# EAGLE board 12VAttinyDischargeChecker-A3 (EAGLE 8.5.2)
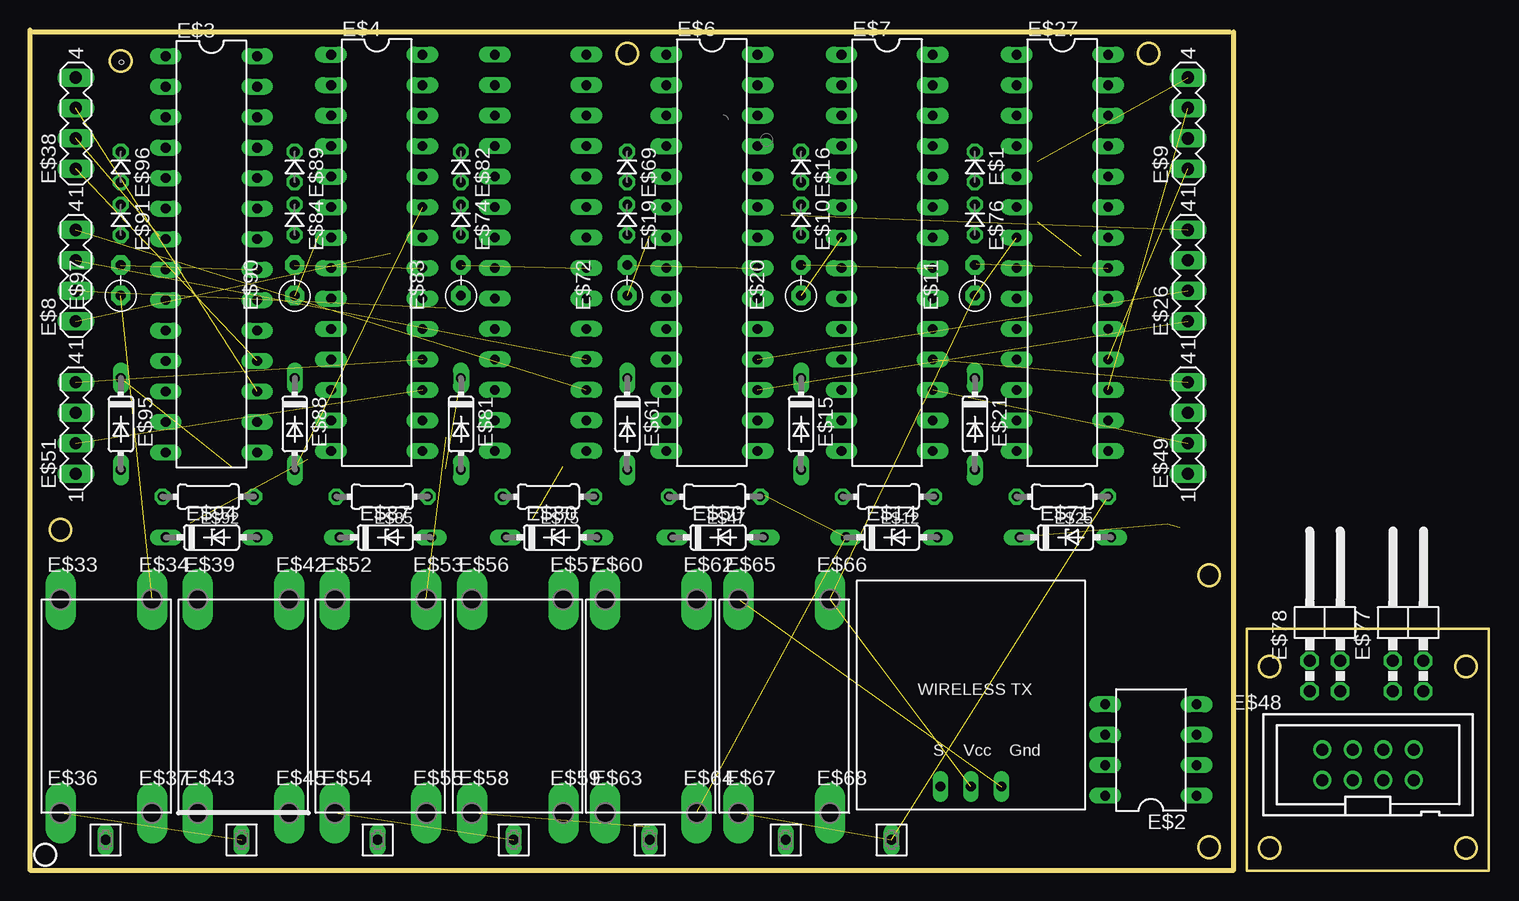
[diagram p0: board, top side]
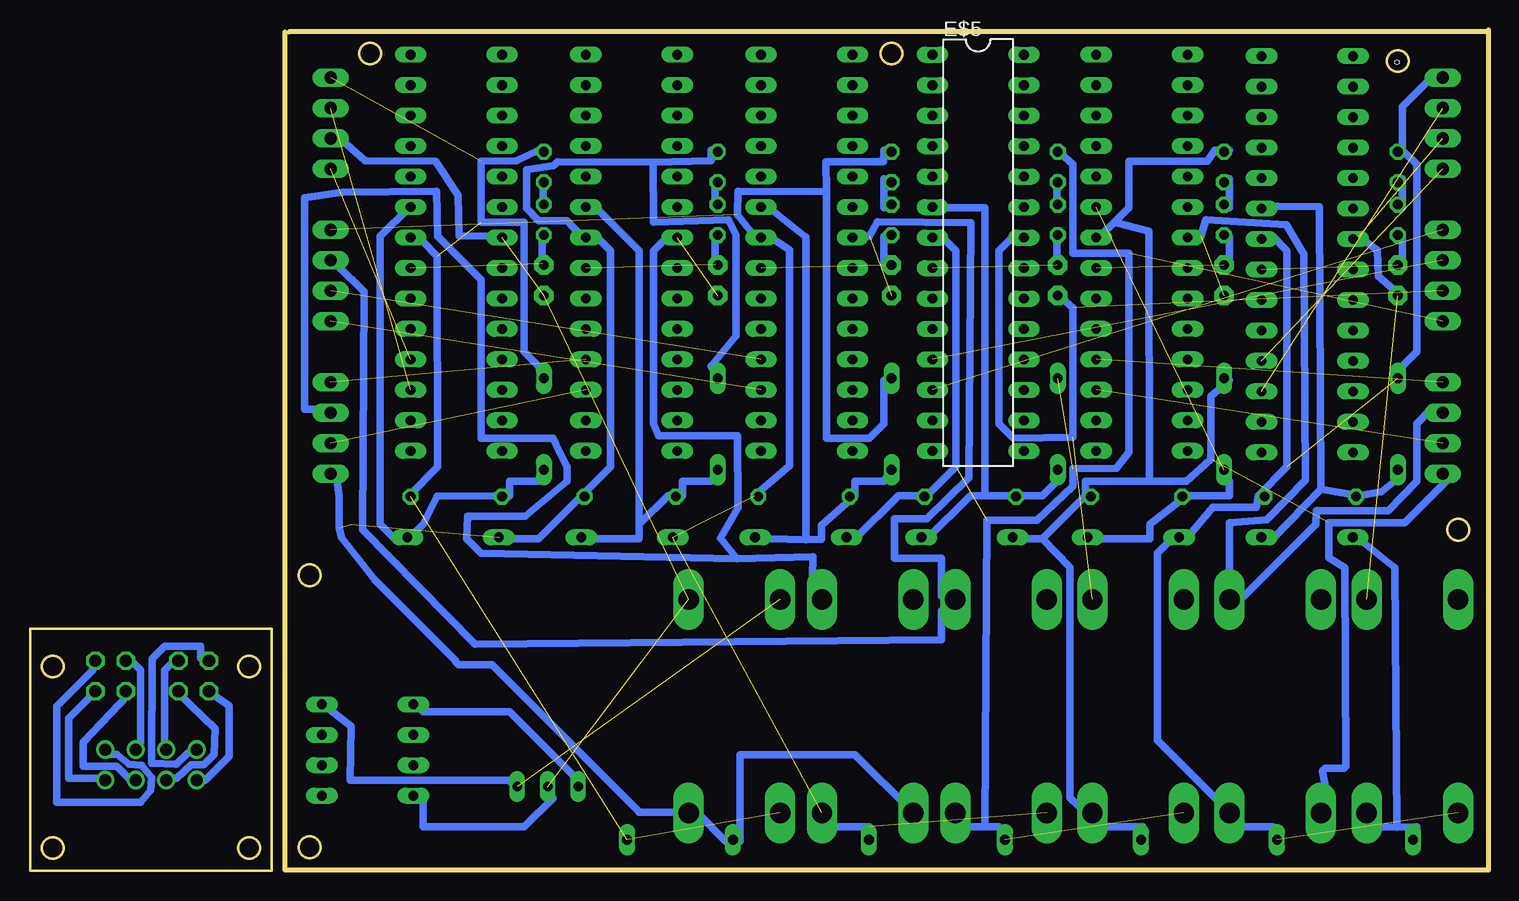
[diagram p1: board, bottom side, seen from below]

Size 121.58 x 70.05 mm. Coordinates in mm from the lower left corner, seen from the top.
Outline: 0,69.9 0,0.05 100.33,0.05 100.33,69.9
Outline: 0,69.9 0,70.05
Outline: 0,69.9 100,69.9
Outline: 101.42,0 101.42,20.17 121.58,20.17 121.58,0 101.42,0
Outline: circle at 119.69,17.01 radius 0.89
Outline: circle at 103.31,17.01 radius 0.89
Outline: circle at 103.31,1.89 radius 0.89
Outline: circle at 119.69,1.89 radius 0.89
Outline: circle at 98.28,1.94 radius 0.89
Outline: circle at 98.28,24.62 radius 0.89
Outline: circle at 7.56,67.46 radius 0.89
Outline: circle at 2.52,28.4 radius 0.89
Outline: circle at 49.77,68.09 radius 0.89
Outline: circle at 93.23,68.09 radius 0.89
Copper layers (1*16): Top 0.035mm / dielectric 1.5mm / Bottom 0.035mm
Design rules "default": minimum track width 10mil, minimum drill 24mil, track to track 8mil, track to pad 8mil, pad to pad 8mil, via to via 8mil, smd to smd 8mil, copper to edge 40mil, drill to drill 8mil, minimum pad ring 10mil, minimum via ring 8mil, stop-mask expansion 4mil, vias tented up to drill 0mil, thermal gap 10mil
Holes 0.35 mm at 7.62,67.36

## Footprints (pad centres in the part's own frame; a part is rotated, then mirrored left to right if it is on the bottom)
D-2.5 = drill 0.813 octagon: A 1.27,0; C -1.27,0
DIL08 = drill 0.813 long: 1 -3.81,-3.81; 2 -1.27,-3.81; 3 1.27,-3.81; 4 3.81,-3.81; 5 3.81,3.81; 6 1.27,3.81; 7 -1.27,3.81; 8 -3.81,3.81
DIL28-3 = drill 0.813 long: 1 -16.51,-3.81; 2 -13.97,-3.81; 3 -11.43,-3.81; 4 -8.89,-3.81; 5 -6.35,-3.81; 6 -3.81,-3.81; 7 -1.27,-3.81; 8 1.27,-3.81; 9 3.81,-3.81; 10 6.35,-3.81; 11 8.89,-3.81; 12 11.43,-3.81; 13 13.97,-3.81; 14 16.51,-3.81; 15 16.51,3.81; 16 13.97,3.81; 17 11.43,3.81; 18 8.89,3.81; 19 6.35,3.81; 20 3.81,3.81; 21 1.27,3.81; 22 -1.27,3.81; 23 -3.81,3.81; 24 -6.35,3.81; 25 -8.89,3.81; 26 -11.43,3.81; 27 -13.97,3.81; 28 -16.51,3.81
MA04-1 = drill 1.016 long: 1 -3.81,0; 2 -1.27,0; 3 1.27,0; 4 3.81,0
RS-2,5 = drill 0.813 pad 1.6 octagon: 1 -1.27,0; 2 1.27,0
0204/7 = drill 0.813 octagon: 1 -3.81,0; 2 3.81,0
DO35Z7 = drill 0.813 long: A 3.81,0; C -3.81,0
DO35-7A = drill 0.813 long: A 3.81,0; C -3.81,0
FE01-1 = drill 0.813 long: 1 -1.27,0
WIRELESS-TX-FLAT = drill 0.8 long: P$1 0.635,-6.35; P$2 -1.905,-6.35; P$3 3.175,-6.35
P1-17Y = drill 1.702 pad 2.121 long: TP 0,0
PAK100/2500-8 = drill 1 pad 1.422: 3 -2.54,-1.27; 4 -2.54,1.27; 5 0,-1.27; 6 0,1.27; 7 2.54,-1.27; 8 2.54,1.27; 9 5.08,-1.27; 10 5.08,1.27
2X02/90 = drill 1.016 octagon: 1 -1.27,-6.35; 2 -1.27,-3.81; 3 1.27,-6.35; 4 1.27,-3.81

## Placement (x,y rotation side)
E$1  [D-2.5]  78.75,58.64 270 top
E$2  [DIL08]  93.43,10.05 90 top
E$3  [DIL28-3]  15.11,51.36 270 top
E$4  [DIL28-3]  28.89,51.48 270 top
E$5  [DIL28-3]  42.55,51.48 270 bottom
E$6  [DIL28-3]  56.83,51.48 270 top
E$7  [DIL28-3]  71.44,51.48 270 top
E$8  [MA04-1]  3.81,49.58 90 top
E$9  [MA04-1]  96.52,62.28 90 top
E$10  [D-2.5]  64.26,54.23 270 top
E$11  [RS-2,5]  78.75,49.19 90 top
E$12  220  [0204/7]  71.55,31.16 180 top
E$14  Zener 12v  [DO35Z7]  71.82,27.77 0 top
E$15  [DO35-7A]  64.26,37.22 270 top
E$16  [D-2.5]  64.26,58.64 270 top
E$17  [FE01-1]  7.56,2.57 0 top
E$19  [D-2.5]  49.77,54.23 270 top
E$20  [RS-2,5]  64.26,49.19 90 top
E$21  Zener 5V  [DO35-7A]  78.75,37.22 270 top
E$24  [FE01-1]  18.9,2.57 0 top
E$25  220  [0204/7]  86.04,31.16 180 top
E$26  [MA04-1]  96.52,49.58 90 top
E$27  [DIL28-3]  86.04,51.48 270 top
E$28  [FE01-1]  30.24,2.57 0 top
E$32  [WIRELESS-TX-FLAT]  77.79,13.36 0 top
E$33  [P1-17Y]  2.54,22.59 0 top
E$34  [P1-17Y]  10.16,22.59 0 top
E$35  [FE01-1]  41.58,2.57 0 top
E$36  [P1-17Y]  2.54,4.81 0 top
E$37  [P1-17Y]  10.16,4.81 0 top
E$38  [MA04-1]  3.81,62.28 90 top
E$39  [P1-17Y]  13.97,22.59 0 top
E$41  [FE01-1]  52.92,2.57 0 top
E$42  [P1-17Y]  21.59,22.59 0 top
E$43  [P1-17Y]  13.97,4.81 0 top
E$44  [FE01-1]  64.26,2.57 0 top
E$45  [P1-17Y]  21.59,4.81 0 top
E$46  [FE01-1]  73.08,2.57 0 top
E$47  220  [0204/7]  57.06,31.16 180 top
E$48  [PAK100/2500-8]  110.25,8.82 0 top
E$49  [MA04-1]  96.52,36.88 90 top
E$50  Zener 12v  [DO35Z7]  57.33,27.77 0 top
E$51  [MA04-1]  3.81,36.88 90 top
E$52  [P1-17Y]  25.4,22.59 0 top
E$53  [P1-17Y]  33.02,22.59 0 top
E$54  [P1-17Y]  25.4,4.81 0 top
E$55  [P1-17Y]  33.02,4.81 0 top
E$56  [P1-17Y]  36.83,22.59 0 top
E$57  [P1-17Y]  44.45,22.59 0 top
E$58  [P1-17Y]  36.83,4.81 0 top
E$59  [P1-17Y]  44.45,4.81 0 top
E$60  [P1-17Y]  47.94,22.59 0 top
E$61  [DO35-7A]  49.77,37.22 270 top
E$62  [P1-17Y]  55.56,22.59 0 top
E$63  [P1-17Y]  47.94,4.81 0 top
E$64  [P1-17Y]  55.56,4.81 0 top
E$65  [P1-17Y]  59.05,22.59 0 top
E$66  [P1-17Y]  66.67,22.59 0 top
E$67  [P1-17Y]  59.05,4.81 0 top
E$68  [P1-17Y]  66.67,4.81 0 top
E$69  [D-2.5]  49.77,58.64 270 top
E$70  [LOGO]  -39.37,56.56 0 top  (outside the outline)
E$71  Zener 12v  [DO35Z7]  86.31,27.77 0 top
E$72  [RS-2,5]  49.77,49.19 90 top
E$73  [LOGO]  53.98,60.38 0 top
E$74  [D-2.5]  35.91,54.23 270 top
E$75  220  [0204/7]  43.2,31.16 180 top
E$76  [D-2.5]  78.75,54.23 270 top
E$77  [2X02/90]  114.86,21.3 0 top
E$78  [2X02/90]  107.94,21.3 0 top
E$80  Zener 12v  [DO35Z7]  43.47,27.77 0 top
E$81  [DO35-7A]  35.91,37.22 270 top
E$82  [D-2.5]  35.91,58.64 270 top
E$83  [RS-2,5]  35.91,49.19 90 top
E$84  [D-2.5]  22.05,54.23 270 top
E$85  220  [0204/7]  29.34,31.16 180 top
E$87  Zener 12v  [DO35Z7]  29.61,27.77 0 top
E$88  [DO35-7A]  22.05,37.22 270 top
E$89  [D-2.5]  22.05,58.64 270 top
E$90  [RS-2,5]  22.05,49.19 90 top
E$91  [D-2.5]  7.56,54.23 270 top
E$92  220  [0204/7]  14.85,31.16 180 top
E$94  Zener 12v  [DO35Z7]  15.12,27.77 0 top
E$95  [DO35-7A]  7.56,37.22 270 top
E$96  [D-2.5]  7.56,58.64 270 top
E$97  [RS-2,5]  7.56,49.19 90 top

## Library data of the parts
E$1 E$10 E$14 E$16 E$19 E$50 E$69 E$71 E$74 E$76 E$80 E$82 E$84 E$87 E$89 E$91 E$94 E$96 = ref-packages
E$2-E$7 E$27 = 74xx-us
E$8 E$9 E$26 E$38 E$49 E$51 = con-lstb
E$11 E$20 E$72 E$83 E$90 E$97 = discrete
E$12 E$25 E$47 E$75 E$85 E$92 = eagle-ltspice
E$15 E$21 E$61 E$81 E$88 E$95 = diode
E$17 E$24 E$28 E$35 E$41 E$44 E$46 = con-lsta2
E$32 = LSGPackages
E$33 E$34 E$36 E$37 E$39 E$42 E$43 E$45 E$52-E$60 E$62-E$68 = testpad
E$48 = con-3m
E$70 E$73 = atmel
E$77 E$78 = pinhead

## Nets
S$2: E$3.22 E$24.1 E$36.TP E$38.4 E$45.TP E$87.C E$92.1 E$95.C E$96.C
S$3: E$2.4 E$32.P$3 E$65.TP
S$4: E$11.2 E$27.21 E$76.A
S$5: E$1.A E$76.C
S$8: E$3.7 E$34.TP E$38.2 E$97.1
S$9: E$9.3 E$27.17
S$10: E$17.1 E$37.TP E$94.C
S$11: E$5.22 E$8.2 E$53.TP E$83.1
S$12: E$4.7 E$42.TP E$51.3 E$90.1
S$13: E$9.1 E$27.18
S$14: E$6.18 E$26.2
S$15: E$2.8 E$9.2 E$11.1 E$27.7 E$32.P$1 E$66.TP
S$16: E$2.5 E$32.P$2
S$18: E$6.23 E$47.2 E$50.A E$61.A
S$19: E$5.13
S$21: E$7.23 E$12.2 E$14.A E$15.A
S$22: E$21.A E$25.2 E$27.23 E$71.A
S$23: E$4.22 E$28.1 E$43.TP E$51.1 E$55.TP E$80.C E$85.1 E$88.C E$89.C
S$24: E$5.7 E$8.1 E$35.1 E$50.C E$54.TP E$59.TP E$75.1 E$81.C E$82.C
S$25: E$6.22 E$14.C E$26.4 E$41.1 E$47.1 E$58.TP E$61.C E$64.TP E$69.C
S$26: E$7.22 E$12.1 E$15.C E$16.C E$44.1 E$49.1 E$63.TP E$68.TP E$71.C
S$27: E$6.17 E$26.1
S$28: E$6.7 E$26.3 E$57.TP E$72.1
S$29: E$5.6 E$75.2 E$80.A E$81.A
S$30: E$7.18 E$49.4
S$31: E$7.17 E$49.2
S$32: E$7.7 E$20.1 E$49.3 E$62.TP
S$33: E$4.23 E$85.2 E$87.A E$88.A
S$35: E$3.17 E$38.3
S$36: E$7.21 E$10.A E$20.2
S$37: E$1.C E$9.4 E$21.C E$25.1 E$27.22 E$46.1 E$67.TP
S$38: E$3.18 E$38.1
S$39: E$5.12 E$8.4
S$40: E$3.23 E$92.2 E$94.A E$95.A
S$41: E$10.C E$16.A
S$42: E$6.21 E$19.A E$72.2
S$43: E$48.10 E$77.4
S$44: E$48.9 E$77.3
S$45: E$19.C E$69.A
S$46: E$5.8 E$74.A E$83.2
S$47: E$74.C E$82.A
S$48: E$4.21 E$84.A E$90.2
S$49: E$84.C E$89.A
S$50: E$3.21 E$91.A E$97.2
S$51: E$48.8 E$77.2
S$52: E$48.7 E$77.1
S$53: E$48.6 E$78.4
S$54: E$48.5 E$78.3
S$55: E$48.4 E$78.2
S$56: E$48.3 E$78.1
S$57: E$91.C E$96.A
S$59: E$5.11 E$8.3
S$60: E$4.18 E$51.4
S$61: E$4.17 E$51.2

## Tracks (layer width: path | path; a pad name or v marks a point on that pad's centre or on a via)
S$2  (2 unrouted)
  Bottom 0.61: E$24.1 18,3.65 20.4,3.65 E$45.TP 21.6,4.85 27.6,10.85 27.6,26.45 26.4,27.65 E$87.C 25.2,27.65 22.96,30.27 19.36,30.27 19.2,31.25 | 19.2,31.25 16.8,33.65 16.8,51.65 18,52.85 E$3.22 | 19.2,31.25 E$92.1 | 7.2,60.05 6,58.85 6,43.25 7.2,42.05 E$95.C | 7.2,60.05 7.2,63.65 4.8,66.05 E$38.4 | 7.2,60.05 E$96.C
S$3  (1 unrouted)
  Bottom 0.61: E$32.P$3 81.7,7.51 94.9,7.51 94.8,12.05 97.43,14.08 E$2.4
S$4  (1 unrouted)
  Bottom 0.61: E$76.A 78.89,52.97 78.89,50.57 E$11.2
S$5
  Bottom 0.61: E$76.C 78.81,55.35 78.81,57.47 E$1.A
S$8  (2 unrouted)
  Bottom 0.61: E$3.7 10.8,52.85 9.26,51.71 9.2,49.54 7.37,47.94 E$97.1
S$9  (1 unrouted)
S$10
  Bottom 0.61: 7.64,3.62 9.6,3.65 E$37.TP | 7.64,3.62 6,3.65 E$17.1 | 7.64,3.62 7.81,25.22 10.8,27.65 E$94.C
S$11  (2 unrouted)
  Bottom 0.61: E$5.22 39.6,52.85 40.8,51.65 40.8,37.25 39.6,36.05 34.66,36.1 34.66,46.9 36,48.05 E$83.1
S$12  (1 unrouted)
  Bottom 0.61: E$4.7 24,52.85 23.54,54.23 16.87,53.83 15.39,51.38 15.26,32.52 18.49,29.23 21.6,28.99 21.6,22.85 E$42.TP 20.4,22.85 14.4,28.85 14.35,30 8.35,30 6,32.45 6,37.25 4.8,38.45 E$51.3
S$13  (1 unrouted)
S$14  (1 unrouted)
S$15  (3 unrouted)
  Bottom 0.61: E$32.P$1 78,6.05 80.4,3.65 88.8,3.65 88.8,6.05 E$2.8 | E$27.7 82.8,52.85 85.83,52.91 85.89,56.28 87.77,59.13 93.64,59.17 96,61.25 E$9.2
S$16
  Bottom 0.61: E$32.P$2 75.6,7.25 81.6,13.25 88.8,13.25 E$2.5
S$18
  Bottom 0.61: 56.92,27.58 55.62,27.59 55.62,28.79 52.8,31.25 | 56.92,27.58 60,27.65 E$50.A | 52.8,31.25 52.8,32.45 50.4,32.45 E$61.A | 52.8,31.25 E$47.2 | 56.92,27.58 56.92,52.78 60,55.25 E$6.23
S$21
  Bottom 0.61: 70.8,28.85 70.8,27.65 75.6,27.65 E$14.A | 70.8,28.85 68.4,31.25 E$12.2 67.2,31.25 67.2,32.45 64.8,32.45 E$15.A | 70.8,28.85 70.8,51.65 74.4,55.25 E$7.23
S$22
  Bottom 0.61: E$21.A 79.2,32.45 81.6,32.45 81.6,31.25 E$25.2 82.8,31.25 87.64,31.2 88.8,28.85 90,27.65 E$71.A 91.2,27.65 92.4,28.85 92.4,52.85 90,55.25 E$27.23
S$23  (1 unrouted)
  Bottom 0.61: E$51.1 3.53,32.45 6.99,29 13.34,29 13.34,26.09 12,25.25 11.9,8.71 12.08,8.54 13.59,8.54 13.85,8.28 13.4,5.97 13.2,4.85 E$43.TP | 31.2,54.05 32.4,52.85 E$4.22 | 31.2,54.05 30,55.25 29.97,59.12 23.46,59.12 22.8,60.05 21.6,60.05 E$89.C | E$28.1 28.8,3.65 32.4,3.65 E$55.TP 33.6,4.85 34.92,6.09 34.92,25.29 37.2,27.65 | 37.2,27.65 33.6,31.25 | 37.2,27.65 39.6,27.65 E$80.C | 28.29,32.45 33.6,32.45 33.6,31.25 | 28.29,32.45 25.2,32.45 23.14,34.28 23.17,39.51 21.6,40.85 E$88.C | 33.6,31.25 E$85.1 | 31.2,54.05 28.33,53.29 28.29,32.45
S$24  (4 unrouted)
  Bottom 0.61: 46.8,31.25 49.2,31.25 52.8,27.65 E$50.C | 46.8,31.25 44.4,33.65 44.4,51.65 45.6,52.85 E$5.7 | 46.8,31.25 E$75.1 | 42,3.65 44.4,3.65 E$59.TP | 42,3.65 40.8,3.65 E$35.1 | 42,3.65 41.8,29.21 37.65,29.18 34.66,32.05 34.63,33.49 31.04,33.53 30,34.85 30,51.46 34.66,51.46 34.66,58.85 36,60.05 E$82.C
S$25  (4 unrouted)
  Bottom 0.61: E$41.1 51.6,3.65 55.2,3.65 E$64.TP | E$47.1 61.2,31.25 58.25,33.72 58.25,51.72 60,52.85 E$6.22 61.2,52.85 62.61,54.67 62.57,56.62 55.2,56.58 | 55.2,56.58 55.23,59.07 50.43,59.07 50.4,60.05 E$69.C | 55.2,56.58 55.2,36.05 51.6,36.05 50.4,37.25 50.4,40.85 E$61.C
S$26  (2 unrouted)
  Bottom 0.61: 69.66,59.02 69.6,54.05 63.37,54.22 62.74,52.96 62.74,44.56 64.8,42.05 E$15.C | 69.66,59.02 64.8,59.15 64.8,60.05 E$16.C | 75.6,31.25 79.2,27.65 81.6,27.65 E$71.C | 75.6,31.25 73.2,33.65 73.2,51.65 74.4,52.85 E$7.22 75.6,52.85 76.83,54.14 79.2,54.14 80.17,55.19 80.17,58.39 77.98,58.73 arc-10 77.6,59.06 69.66,59.02 | 75.6,31.25 E$12.1 | E$49.1 96,32.45 95.82,31.25 95.82,28.56 95.62,27.74 92.82,24.19 86.12,17.49 86.12,17.42 85.85,17.14 83.05,17.14 70.8,4.89 70.8,4.85 67.2,4.85 E$68.TP 66,4.85 63.6,2.45 E$44.1 62.4,2.45 62.4,9.65 52.8,9.65 48,4.85 E$63.TP
S$27  (1 unrouted)
S$28  (1 unrouted)
  Bottom 0.61: E$6.7 52.8,52.85 51.6,52.85 50.93,54.09 43.16,53.97 43.3,32.75 46.8,29.33 49.54,29.33 49.54,26.04 45.6,26.04 45.6,22.85 E$57.TP 45.6,21.65 45.6,19.25 84.49,18.86 93.86,28.4 93.71,48.22 96,50.45 E$26.3
S$29
  Bottom 0.61: 39.6,31.25 37.2,31.25 36,32.45 E$81.A | 39.6,31.25 42,31.25 | 42,31.25 43.2,31.25 46.8,27.65 E$80.A | 39.6,31.25 E$75.2 | 42,31.25 42,55.25 45.6,55.25 E$5.6
S$30  (1 unrouted)
S$31  (1 unrouted)
S$32  (1 unrouted)
  Bottom 0.61: 62.64,26 64.03,27.7 62.56,30.22 62.59,36.22 69.2,36.22 69.6,37.25 69.6,51.65 68.4,52.85 E$7.7 | 62.64,26 56.3,26.15 56.4,22.85 E$62.TP | 62.64,26 84,26.45 85.2,27.65 85.1,29.54 80.3,29.54 76.8,32.45 76.8,33.65 77.49,34.96 78,36.05 84,36.05 84,49.25 87.6,52.85 87.7,56.61 95.51,56.55 98.68,56.08 98.68,38.43 97.2,38.45 E$49.3
S$33  (1 unrouted)
  Bottom 0.61: 25.2,31.25 21.6,31.25 21.6,32.45 E$88.A | 25.2,31.25 28.21,28.85 28.21,27.65 32.4,27.65 E$87.A | 25.2,31.25 E$85.2
S$35  (1 unrouted)
S$36  (1 unrouted)
  Bottom 0.61: E$10.A 64.47,52.9 64.47,50.5 E$20.2
S$37  (4 unrouted)
  Bottom 0.61: E$25.1 90,31.25 87.6,33.65 87.63,51.18 88.83,52.38 E$27.22 | E$21.C 79.2,42.05 80.4,43.25 80.4,54.05 84,54.05 83.97,59.12 81.03,59.15 79.2,60.05 E$1.C
S$38  (1 unrouted)
S$39  (1 unrouted)
S$40
  Bottom 0.61: 10.8,31.25 8.92,31.58 7.58,32.64 E$95.A | 14,31.77 18,27.65 E$94.A | 10.8,31.25 14,31.77 | 10.8,31.25 E$92.2 | 14,31.77 14.09,55.33 17.58,55.35 E$3.23
S$41
  Bottom 0.61: E$10.C 64.46,55.25 64.46,57.65 E$16.A
S$42  (1 unrouted)
  Bottom 0.61: E$19.A 50.4,52.85 50.4,50.45 E$72.2
S$43
  Bottom 0.61: E$48.10 115.36,9.7 114.36,9.7 113.33,8.87 112.28,8.78 111.46,7.75 111.51,6.69 112.36,5.7 119.36,5.7 119.36,13.7 116.36,16.7 116.36,17.7 E$77.4
S$44
  Bottom 0.61: E$48.9 115.36,7.7 118.36,7.7 118.36,12.7 116.36,14.7 E$77.3
S$45
  Bottom 0.61: E$19.C 50.4,55.25 50.4,57.65 E$69.A
S$46  (1 unrouted)
  Bottom 0.61: E$74.A 36,52.85 36,50.45 E$83.2
S$47
  Bottom 0.61: E$74.C 36,55.25 36,57.65 E$82.A
S$48  (1 unrouted)
  Bottom 0.61: E$84.A 21.6,52.85 21.6,50.45 E$90.2
S$49
  Bottom 0.61: E$84.C 21.6,55.25 21.6,57.65 E$89.A
S$50  (1 unrouted)
  Bottom 0.61: E$91.A 7.2,52.85 7.2,50.45 E$97.2
S$51
  Bottom 0.61: E$48.8 112.36,10.7 112.36,16.7 113.36,17.7 E$77.2
S$52
  Bottom 0.61: E$48.7 113.36,7.7 114.36,8.7 117.16,8.7 117.16,10.7 113.36,14.7 E$77.1
S$53
  Bottom 0.61: E$48.6 110.36,10.7 110.36,16.7 109.36,17.7 E$78.4
S$54
  Bottom 0.61: E$48.5 110.36,7.7 109.36,7.7 108.14,8.8 107.11,8.82 106.24,9.68 106.13,11.83 109.25,14.84 E$78.3
S$55
  Bottom 0.61: E$48.4 108.46,9.76 109.38,8.88 111.45,8.95 111.42,17.67 110.36,18.7 107.36,18.7 107.36,17.7 E$78.2
S$56
  Bottom 0.61: E$48.3 106.97,7.51 104.97,9.51 104.99,13.75 106.36,14.7 E$78.1
S$57
  Bottom 0.61: E$91.C 7.2,55.25 7.2,57.65 E$96.A
S$59  (1 unrouted)
S$60  (1 unrouted)
S$61  (1 unrouted)

## Text on the board
bTest: B5 | B4 | B3 | B2 | B1 | B0 | B0 | B2 | B1 | Out+ | Out- | Out+ | Out- | Out+ | Out- | Out+ | Out- | Out+ | Out- | Out+ | Out- | Vi | V | A | M | In- | In+ | In- | In+ | In- | In+ | In- | In+ | In- | In+ | In- | In+ | G | R | Bi | B | 14v | 84v | 70v | 56v | 42v | 28v | 14v | 0v